# EAGLE board Synth-v0.61 (EAGLE 7.6.0)
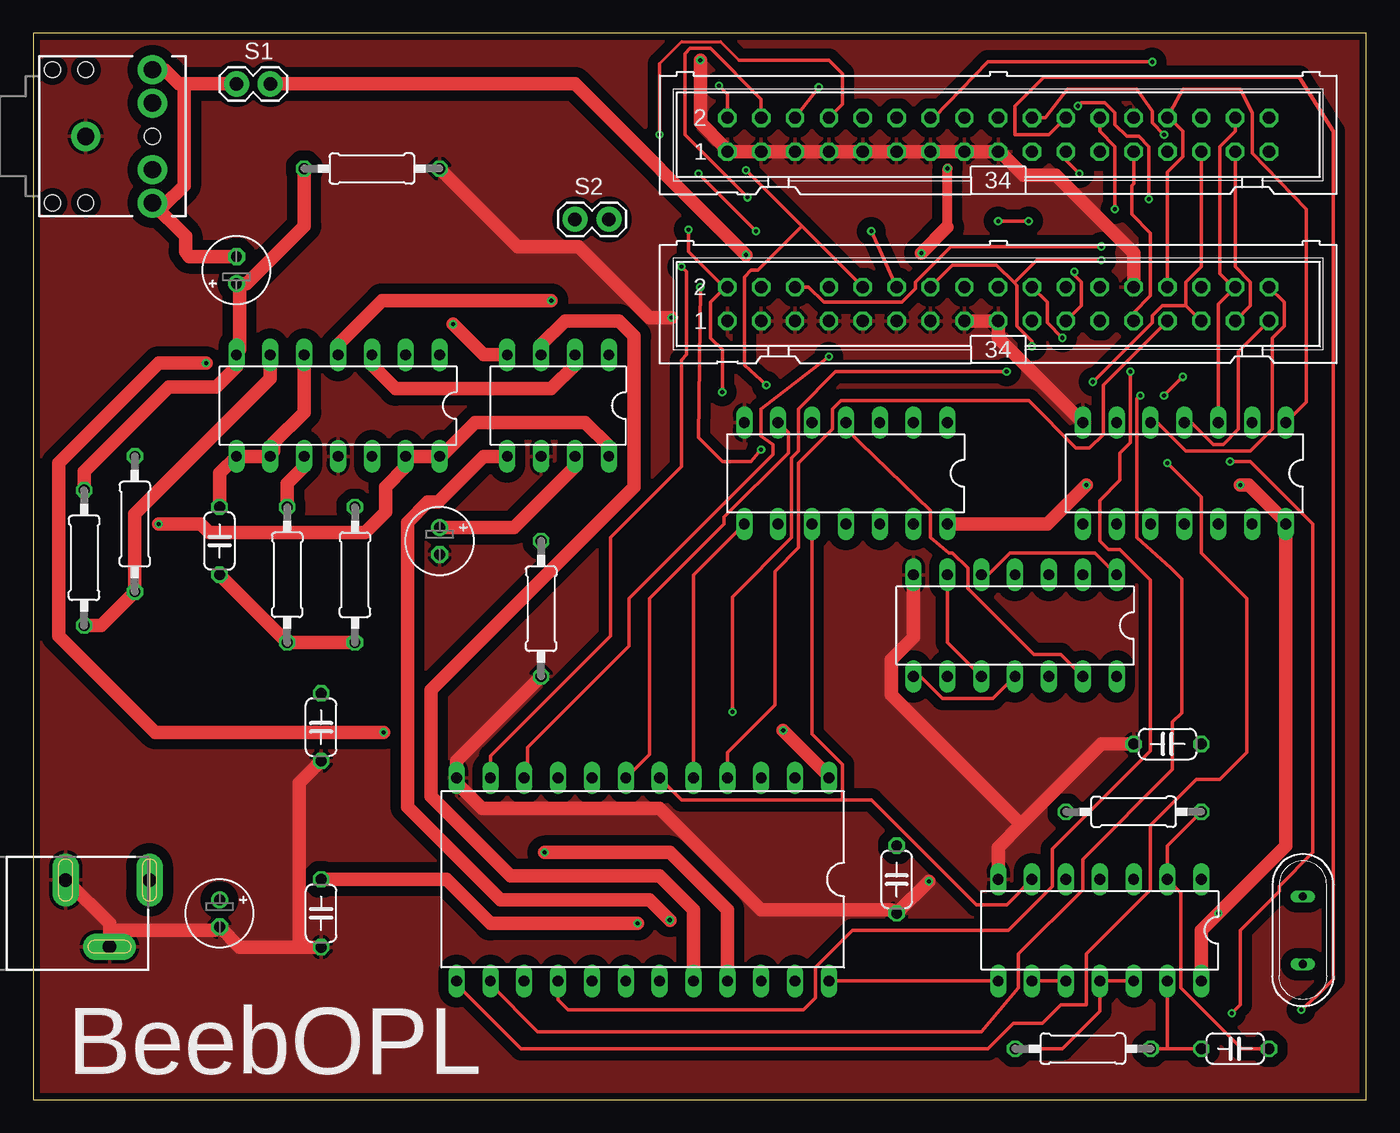
[diagram p0: board, top side]
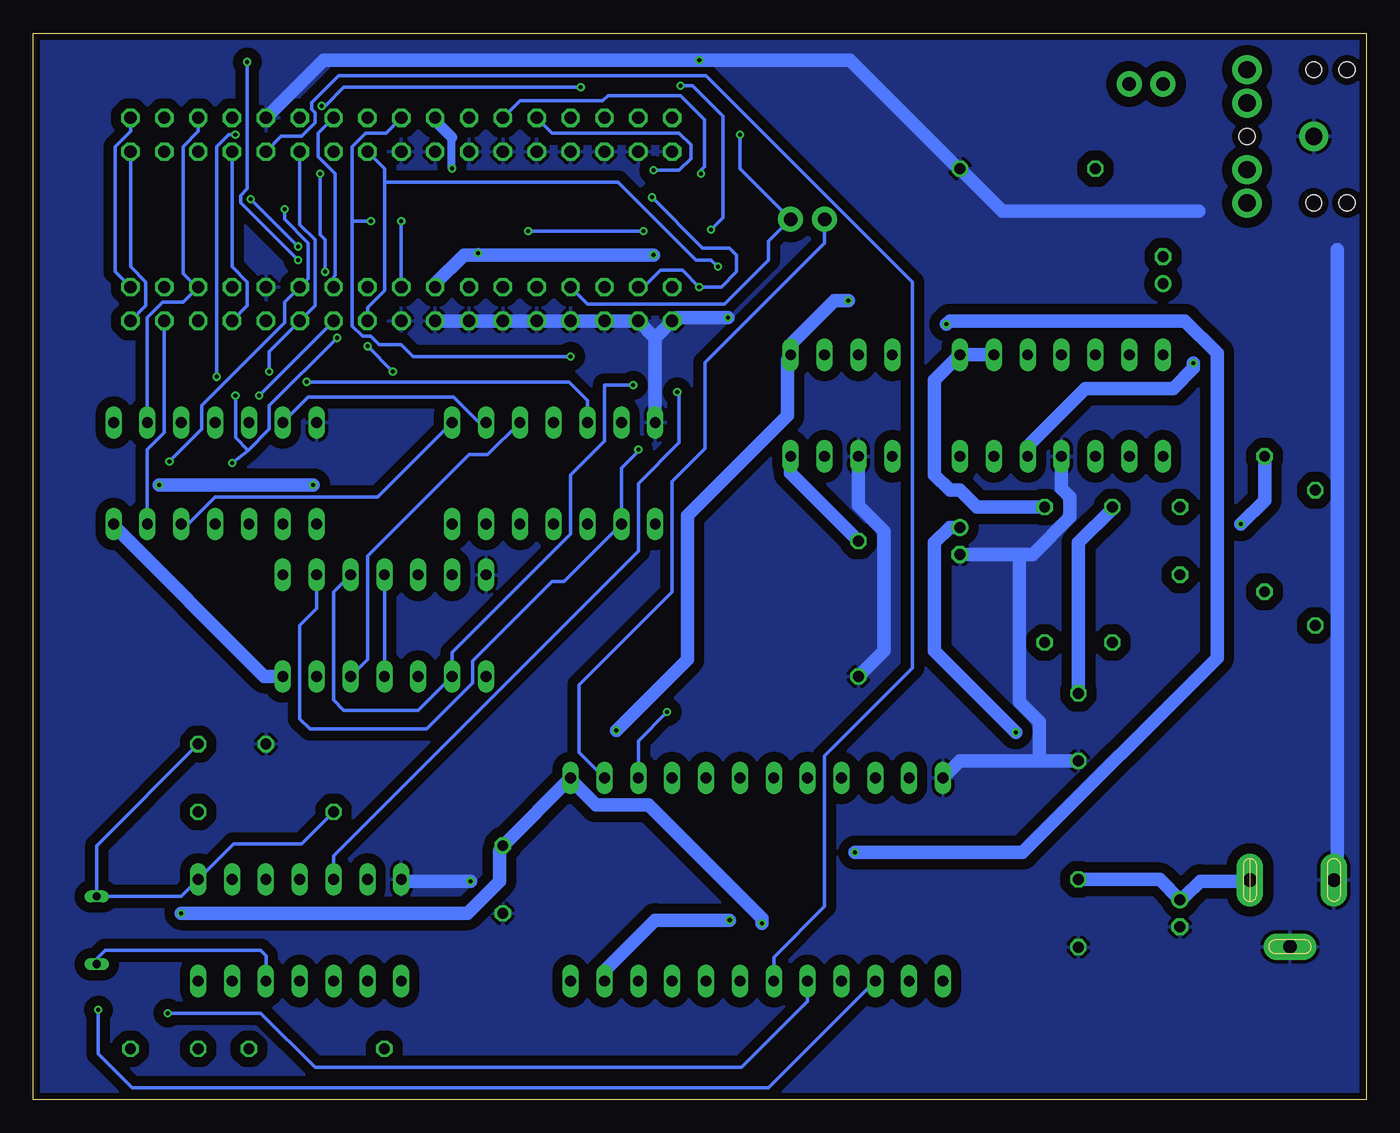
[diagram p1: board, bottom side, seen from below]

Size 100 x 80 mm. Coordinates in mm from the lower left corner, seen from the top.
Outline: 0,0 100,0 100,80 0,80 0,0
Copper layers (1*16): Top 0.035mm / dielectric 1.6mm / Bottom 0.035mm
Design rules "PCBWay_2-layer_PCB_eagle_rule": minimum track width 6mil, minimum drill 12mil, track to track 6mil, track to pad 6mil, pad to pad 6mil, via to via 8mil, smd to smd 0mil, copper to edge 20mil, drill to drill 10mil, minimum pad ring 6mil, minimum via ring 6mil, stop-mask expansion 0mil, vias tented up to drill 100mil, thermal gap 10mil
Net classes: 0 default: width 0.254 mm, clearance 0.254 mm; 1 pwr: width 1.016 mm, clearance 0.762 mm; 2 audio: width 1.016 mm, clearance 0.762 mm; 3 gnd: width 1.016 mm, clearance 0.762 mm

## Footprints (pad centres in the part's own frame; a part is rotated, then mirrored left to right if it is on the bottom)
E2-5 = drill 0.813 pad 1.27: + -1.016,0 | drill 0.813 pad 1.27 octagon: - 1.016,0
C050-024X044 = drill 0.813 octagon: 1 -2.54,0; 2 2.54,0
DIL14 = drill 0.813 long: 1 -7.62,-3.81; 2 -5.08,-3.81; 3 -2.54,-3.81; 4 0,-3.81; 5 2.54,-3.81; 6 5.08,-3.81; 7 7.62,-3.81; 8 7.62,3.81; 9 5.08,3.81; 10 2.54,3.81; 11 0,3.81; 12 -2.54,3.81; 13 -5.08,3.81; 14 -7.62,3.81
YM3014B = drill 0.813 long: CLOCK 3.81,3.81; GND 1.27,3.81; LOAD 1.27,-3.81; MP -3.81,3.81; RB -1.27,3.81; SD 3.81,-3.81; TOBUFF -1.27,-3.81; VDD -3.81,-3.81
YM3812 = drill 0.813 long: 0M -13.97,7.62; 0SY -11.43,7.62; /CS 1.27,-7.62; /IC -8.89,-7.62; /IRQ -11.43,-7.62; /RD -1.27,-7.62; /WR -3.81,-7.62; A0 -6.35,-7.62; D0 8.89,-7.62; D1 11.43,-7.62; D2 13.97,7.62; D3 11.43,7.62; D4 8.89,7.62; D5 6.35,7.62; D6 3.81,7.62; D7 1.27,7.62; GND 13.97,-7.62; MO -6.35,7.62; NC8 3.81,-7.62; NC9 6.35,-7.62; NC19 -1.27,7.62; NC22 -8.89,7.62; SH -3.81,7.62; VSS -13.97,-7.62
ML34 = drill 0.914 octagon: 1 -20.32,-1.27; 2 -20.32,1.27; 3 -17.78,-1.27; 4 -17.78,1.27; 5 -15.24,-1.27; 6 -15.24,1.27; 7 -12.7,-1.27; 8 -12.7,1.27; 9 -10.16,-1.27; 10 -10.16,1.27; 11 -7.62,-1.27; 12 -7.62,1.27; 13 -5.08,-1.27; 14 -5.08,1.27; 15 -2.54,-1.27; 16 -2.54,1.27; 17 0,-1.27; 18 0,1.27; 19 2.54,-1.27; 20 2.54,1.27; 21 5.08,-1.27; 22 5.08,1.27; 23 7.62,-1.27; 24 7.62,1.27; 25 10.16,-1.27; 26 10.16,1.27; 27 12.7,-1.27; 28 12.7,1.27; 29 15.24,-1.27; 30 15.24,1.27; 31 17.78,-1.27; 32 17.78,1.27; 33 20.32,-1.27; 34 20.32,1.27
AUDIO-JACK = drill 1.3 pad 2.184: RING 5,5; RSH 5,2.5; SLEEVE 0,0; TIP 5,-5; TSH 5,-2.5 | hole 1.2: 0,5; -2.5,5; -2.5,-5; 0,-5; 5,0
POWER_JACK_SLOT = drill 1 pad 2 long: GND@1 2.58,7.5; GND@2 7.58,10.8; PWR 2.58,13.8
0207/10 = drill 0.813 octagon: 1 -5.08,0; 2 5.08,0
1X02 = drill 1.016 pad 1.88: 1 0,0; 2 2.54,0
QS = drill 0.61 long: 1 -2.54,0; 2 2.54,0

## Placement (x,y rotation side)
C1  4.7uF 35V  [E2-5]  15.24,62.23 90 top
C2  470pF  [C050-024X044]  13.97,41.91 90 top
C3  10uF 16V  [E2-5]  30.48,41.91 270 top
C4  220pF  [C050-024X044]  21.59,27.94 270 top
C5  82pF  [C050-024X044]  85.09,26.67 180 top
C6  10uF 16V  [E2-5]  13.97,13.97 270 top
C7  10nF  [C050-024X044]  21.59,13.97 270 top
C8  10nF  [C050-024X044]  64.77,16.51 270 top
C9  4.7nF  [C050-024X044]  90.17,3.81 180 top
IC1  LM324N  [DIL14]  22.86,52.07 180 top
IC2  YM3014B  [YM3014B]  39.37,52.07 180 top
IC3  74LS00N  [DIL14]  60.96,46.99 180 top
IC4  74LS27N  [DIL14]  86.36,46.99 180 top
IC5  74LS02N  [DIL14]  73.66,35.56 180 top
IC6  YM3812  [YM3812]  45.72,16.51 180 top
IC7  74LS04N  [DIL14]  80.01,12.7 180 top
J1  1 MHz Bus  [ML34]  72.39,72.39 0 top
J2  Feed-through  [ML34]  72.39,59.69 0 top
J3  3.5mm Jack  [AUDIO-JACK]  3.94,72.26 0 top
J4  5V DC  [POWER_JACK_SLOT]  -5.08,19.05 270 top
R1  4k7  [0207/10]  25.4,69.85 180 top
R2  27k  [0207/10]  3.81,40.64 90 top
R3  15k  [0207/10]  7.62,43.18 90 top
R4  33k  [0207/10]  19.05,39.37 90 top
R5  33k  [0207/10]  24.13,39.37 270 top
R6  4k7  [0207/10]  38.1,36.83 90 top
R7  470R  [0207/10]  82.55,21.59 0 top
R8  470R  [0207/10]  78.74,3.81 180 top
S1  1MHz Bus Audio  [1X02]  15.24,76.2 0 top
S2  IRQ  [1X02]  40.64,66.04 0 top
XTAL1  3.579MHz  [QS]  95.25,12.7 270 top

## Library data of the parts
C1-C9 R1-R8 = resistor
IC1 = linear
IC2 IC6 = YMSynth
IC3-IC5 IC7 = 74xx-us
J1 J2 = con-harting-ml; OC_FARNELL: unknown; OC_NEWARK: unknown
J3 = SparkFun-Connectors
J4 = SparkFun-Connectors; PROD_ID: PRT-00119
S1 S2 = SparkFun-Retired
XTAL1 = special

## Nets
1MHZE: IC3.9 IC5.2 J1.4 J2.4
/IRQ: J1.8 J2.8 S2.2
/NMI: J1.6 J2.6
/PGFC: IC5.3 IC5.9 J1.10 J2.10
/PGFD: J1.12 J2.12
/RD: IC3.10 IC6./RD IC7.6
/RST: IC6./IC J1.14 J2.14
A0: IC6.A0 J1.27 J2.27
A1: IC4.1 J1.28 J2.28
A2: IC3.5 J1.29 J2.29
A3: IC4.2 J1.30 J2.30
A4: IC4.13 J1.31 J2.31
A5: IC4.3 J1.32 J2.32
A6: IC4.4 J1.33 J2.33
A7: IC4.5 J1.34 J2.34
AUDIO [audio]: J1.16 J2.16 S1.2
CNPGFC: IC5.4 IC5.8 IC5.11
D0: IC6.D0 J1.18 J2.18
D1: IC6.D1 J1.19 J2.19
D2: IC6.D2 J1.20 J2.20
D3: IC6.D3 J1.21 J2.21
D4: IC6.D4 J1.22 J2.22
D5: IC6.D5 J1.23 J2.23
D6: IC6.D6 J1.24 J2.24
D7: IC6.D7 J1.25 J2.25
GND [gnd]: C3.- C4.2 C5.2 C6.- C7.2 C8.2 IC1.11 IC2.GND IC3.7 IC4.7 IC5.7 IC6.GND IC7.7 J1.1 J1.3 J1.5 J1.7 J1.9 J1.11 J1.13 J1.15 J1.17 J1.26 J2.1 J2.3 J2.5 J2.7 J2.9 J2.11 J2.13 J2.15 J2.17 J2.26 J3.SLEEVE J4.GND@1 J4.GND@2 R1.1 R6.1
N$1: C9.1 IC7.2 R7.2
N$2: IC3.1 IC4.12
N$3: IC3.2 IC4.6
N$4: IC7.11 IC7.12 R8.2 XTAL1.2
N$5: C9.2 IC7.13 R8.1
N$6 [audio]: IC2.LOAD IC6.SH
N$7 [audio]: IC2.SD IC6.MO
N$8 [audio]: IC2.CLOCK IC6.0SY
N$9: C5.1 IC7.1 R7.1 XTAL1.1
N$10: IC5.1 IC5.5
N$11 [audio]: C3.+ IC1.12 IC2.RB
N$12: IC5.6 IC5.10
N$13 [audio]: IC1.13 IC1.14 IC2.MP R3.2 R6.2
N$14: IC3.3 IC5.12
N$15 [audio]: IC1.6 R2.1 R3.1
N$16 [audio]: C1.+ IC1.7 R1.2 R2.2
N$17 [audio]: C1.- J3.RING J3.TIP S1.1
N$18 [audio]: IC1.3 IC2.TOBUFF
N$19 [audio]: IC1.1 IC1.2 R5.1
N$20 [audio]: C2.1 R4.1 R5.2
N$21 [audio]: C4.1 IC1.10 R4.2
N$22 [audio]: C2.2 IC1.5 IC1.8 IC1.9
N$23: IC3.4 IC5.13
N$24: IC3.8 IC6./WR
N$25: IC6.0M IC7.8
N$26: IC7.9 IC7.10
N$30: IC3.6 IC6./CS
R/W: IC7.5 J1.2 J2.2
VCC [pwr]: C6.+ C7.1 C8.1 IC1.4 IC2.VDD IC3.14 IC4.14 IC5.14 IC6.VSS IC7.14 J4.PWR
YM/IRQ: IC6./IRQ S2.1

## Tracks (layer width: path | path; a pad name or v marks a point on that pad's centre or on a via)
1MHZE  (via drill 0.3)
  Top 0.254: v53.59,67.69 48.9,72.39 48.9,78.49 49.28,78.87 50.8,78.87 54.61,75.06 J1.4 | v54.61,48.77 53.85,47.88 51.69,47.88 49.91,49.66 v50.04,60.96
  Bottom 0.254: IC5.2 78.74,36.83 80.01,35.56 80.01,28.57 79.25,27.81 70.48,27.81 67.06,31.24 67.06,32.89 61.09,38.86 60.2,38.86 IC3.9 55.88,47.37 54.74,48.51 v54.61,48.77 | v53.59,67.69 49.78,63.88 47.75,63.88 47.24,63.37 47.24,62.1 48.39,60.96 v50.04,60.96 51.31,62.23 52.96,62.23 54.23,60.96 J2.4
/IRQ  (via drill 0.3)
  Top 0.229: 46.99,77.72 48.64,79.38 51.56,79.38 52.96,77.98
  Top 0.254: J1.8 60.71,74.68 60.71,76.96 59.69,77.98 52.96,77.98 | 46.99,77.72 v46.99,72.39
  Bottom 0.254: J2.8 58.42,59.69 48.13,59.69 44.83,62.99 44.83,64.39 S2.2 46.99,69.85 v46.99,72.39
/NMI  (via drill 0.3)
  Top 0.254: J2.6 58.17,60.96 59.31,59.82 65.15,59.82 66.17,60.83 66.17,61.34 68.83,64.01 v80.14,64.01 | v83.69,67.56 83.69,71.5 82.93,72.26 82.04,72.26 81.15,73.15 81.15,74.04 80.39,74.8 78.61,74.8 v78.36,74.55 | J1.6 v58.93,75.95
  Bottom 0.254: v83.69,67.56 v80.14,64.01 | v78.36,74.55 78.11,74.55 76.71,75.95 v58.93,75.95
/PGFC  (via drill 0.3)
  Top 0.254: v53.47,69.72 57.66,65.53 | 57.66,65.53 J2.10 | v54.99,53.59 54.61,53.98 53.34,55.12 53.34,61.72 53.85,62.23 54.36,62.23 57.66,65.53
  Bottom 0.254: IC5.3 77.47,38.1 77.47,29.97 76.71,29.21 71.12,29.21 IC5.9 68.58,33.53 59.69,42.42 59.69,46.86 57.15,49.4 57.15,53.59 v54.99,53.59 | v53.47,69.72 51.56,69.72 50.67,70.61 50.67,71.63 51.56,72.52 61.09,72.52 J1.10
/PGFD  (via drill 0.3)
  Top 0.254: v62.87,65.15 J2.12 | v49.91,69.47 v54.23,65.15
  Bottom 0.254: v54.23,65.15 v62.87,65.15 | v49.91,69.47 49.91,69.72 49.66,69.98 49.66,73.53 51.44,75.31 56.9,75.31 57.28,74.93 63.5,74.93 J1.12 63.63,74.8
/RD
  Top 0.254: IC7.6 73.03,14.61 70.74,14.61 62.87,22.48 60.71,22.48 | 60.71,22.48 48.64,22.48 IC6./RD | IC3.10 58.42,27.43 60.71,25.15 60.71,22.48
/RST  (via drill 0.3)
  Top 0.254: v73.03,54.61 60.2,54.61 57.4,51.82 57.4,48.64 56.9,48.13 56.9,42.16 52.45,37.72 v52.45,29.08 | v74.93,56.52 74.93,56.9 73.79,58.04 73.79,61.09 73.6,61.28 | 73.6,61.28 72.26,62.61 68.96,62.61 J2.14 | J1.14 67.56,73.66 71.63,77.85 v83.95,77.85 | v80.14,62.99 75.31,62.99 73.6,61.28
  Bottom 0.254: v74.93,56.52 v73.03,54.61 | v83.95,77.85 83.95,68.33 84.45,67.82 84.45,67.31 v80.14,62.99 | v52.45,29.08 54.61,26.92 IC6./IC
A0
  Top 0.254: IC6.A0 52.07,26.04 55.63,29.59 55.63,39.62 57.4,41.4 57.4,47.75 59.94,50.29 59.94,51.82 60.58,52.45 74.68,52.45 78.23,48.9 79.25,48.9 80.26,49.91 80.26,53.59 J2.27
  Bottom 0.254: J1.27 85.09,62.48 83.95,61.34 83.95,59.56 J2.27
A1
  Top 0.254: J2.28 85.09,69.6 86.23,70.74 86.23,72.64 85.22,73.66 J1.28 86.23,75.82 90.55,75.82 91.44,74.04 91.44,70.99 95.5,66.8 95.5,52.32 IC4.1
A2  (via drill 0.3)
  Top 0.254: v79.5,53.85 83.95,58.29 83.95,58.8 84.71,59.56 86.49,59.56 | J2.29 86.49,59.56 | J1.29 87.63,62.48 86.49,61.34 86.49,59.56
  Bottom 0.254: v79.5,53.85 59.82,53.85 58.42,52.45 IC3.5
A3
  Bottom 0.254: IC4.2 91.44,58.67 90.3,59.82 88.77,59.82 J2.30 87.76,60.96 88.77,61.98 88.77,71.5 87.63,72.64 J1.30
A4
  Top 0.254: J1.31 90.17,62.48 91.31,61.34 91.31,59.56 J2.31
  Bottom 0.254: IC4.13 91.44,48.77 90.17,50.04 J2.31
A5
  Top 0.254: IC4.3 88.9,59.69 J2.32 90.04,60.96 89.03,61.98 89.03,71.5 90.17,72.64 J1.32
A6
  Top 0.254: IC4.4 86.87,50.8 88.52,49.15 89.28,49.15 90.42,50.29 90.42,56.13 J2.33
  Bottom 0.254: J1.33 92.71,62.48 91.57,61.34 91.57,59.56 J2.33
A7
  Top 0.254: IC4.5 84.33,50.8 86.49,48.64 91.31,48.64 92.96,50.29 92.96,57.15 93.85,58.04 93.85,59.82 J2.34
  Bottom 0.254: J1.34 92.71,72.64 93.85,71.5 93.85,62.1 J2.34
AUDIO  (via drill 0.3)
  Top 0.61: 68.56,65.45 68.59,65.49
  Top 0.737: 68.59,65.49 v68.59,69.86
  Top 1.016: v53.47,63.37 40.64,76.2 S1.2 | v66.62,63.52 68.56,65.45
  Bottom 0.61: v68.59,69.86 68.6,70 68.6,72.19 | 69.85,73.44 J1.16
  Bottom 0.762: v66.62,63.52 66.67,63.5 66.67,63.37
  Bottom 0.813: 68.6,72.19 69.85,73.44
  Bottom 1.016: J2.16 69.85,61.21 67.69,63.37 66.67,63.37 v53.47,63.37
CNPGFC
  Top 0.254: IC5.8 66.55,31.75 68.2,30.1 72.01,30.1 IC5.11
  Bottom 0.254: IC5.11 IC5.4
D0  (via drill 0.3)
  Top 0.254: v59.69,55.75 54.61,51.82 54.61,49.78 55.5,49.15 55.5,48.39 44.7,37.59 44.7,34.04 37.08,26.42 37.08,24.38 IC6.D0 | v72.39,65.91 v74.68,65.91
  Bottom 0.254: 76.07,65.91 76.07,71.5 75.06,72.52 73.53,72.52 J1.18 | 76.07,65.91 76.07,58.04 75.31,57.28 74.68,57.28 74.04,56.64 72.39,56.64 71.5,55.75 v59.69,55.75 | v72.39,65.91 J2.18 | v74.68,65.91 76.07,65.91
D1  (via drill 0.3)
  Top 0.254: IC6.D1 34.29,25.78 43.31,34.8 43.31,42.16 48.64,47.5 48.64,55.5 49.02,55.88 49.02,62.1 v48.64,62.48
  Bottom 0.254: J2.19 74.93,59.44 73.66,60.71 73.66,68.83 | 73.66,68.83 56.13,68.83 50.29,62.99 49.15,62.99 v48.64,62.48 | 73.66,68.83 73.66,69.85 J1.19
D2  (via drill 0.3)
  Top 0.254: v77.22,57.15 76.07,58.29 76.07,59.82 J2.20 | J1.20 75.95,73.66 77.6,75.82 82.8,75.82 83.95,74.17 83.95,73.28 v84.84,72.39 | v84.84,52.83 v86.23,54.23 | v85.09,47.75 87.63,45.21 87.63,41.02 91.06,37.59 91.06,26.04 89.03,24 87.25,24 83.82,20.57 83.82,15.75 78.99,10.92 78.99,7.11 77.09,7.11 75.69,5.71 73.53,5.71 71.63,3.81 36.58,3.81 31.75,8.64 IC6.D2
  Bottom 0.254: 83.88,48.7 82.3,50.29 82.3,52.07 v77.22,57.15 | 83.88,48.7 v85.09,47.75 | v84.84,72.39 85.34,72.39 86.23,71.5 v86.23,54.23 | v84.84,52.83 84.84,49.66 83.88,48.7
D3  (via drill 0.3)
  Top 0.254: v83.06,52.83 82.8,52.58 82.8,42.16 85.34,39.88 86.17,39.05 86.17,29.02 85.47,28.32 85.47,24.77 78.74,18.03 78.74,15.75 73.91,10.92 73.91,8.38 71.12,5.08 37.85,5.08 34.29,8.64 IC6.D3 | J1.21 77.47,70.48 v78.49,69.47 | v78.11,62.1 78.11,61.85 78.61,61.34 78.61,59.56 J2.21
  Bottom 0.254: J2.21 v83.06,52.83 | v78.49,69.47 78.49,64.9 78.11,64.52 v78.11,62.1
D4  (via drill 0.3)
  Top 0.254: J1.22 76.2,72.39 73.66,72.39 73.66,74.55 75.82,76.71 95,76.71 97.54,72.64 97.54,9.02 96.27,7.75 v95.12,6.73
  Bottom 0.254: J2.22 77.47,61.72 77.34,61.85 77.34,69.47 78.61,70.74 78.61,72.52 J1.22 | IC6.D4 44.83,0.89 92.58,0.89 95.12,3.43 v95.12,6.73
D5  (via drill 0.3)
  Top 0.254: v82.3,54.61 82.3,49.28 81.53,48.51 81.53,46.48 80.01,44.96 80.01,41.91 80.64,41.27 81.53,41.27 83.82,38.99 83.82,26.16 76.45,18.8 76.45,16 73.15,12.7 61.47,12.7 58.67,9.91 58.67,7.62 57.78,6.73 40.13,6.73 39.37,7.49 IC6.D5
  Bottom 0.254: v82.3,54.61 82.3,56.13 J2.23 78.87,59.56 78.87,64.52 80.01,65.66 J1.23
D6  (via drill 0.3)
  Top 0.254: v89.79,47.88 91.31,47.88 96.01,43.18 96.01,18.54 93.47,16 93.47,15.62 90.55,12.7 90.55,7.11 v89.92,6.48 | J1.24 80.01,72.64 81.15,71.5 v81.15,66.8
  Bottom 0.254: v89.79,47.88 87.38,50.29 87.38,52.07 81.15,58.29 81.15,59.82 J2.24 79.38,61.59 79.38,64.26 81.15,66.04 v81.15,66.8 | IC6.D6 41.91,7.37 46.86,2.41 78.87,2.41 82.93,6.48 v89.92,6.48
D7
  Top 0.254: J2.25 82.55,59.05 83.82,60.33 83.82,65.02 82.42,66.42 82.42,68.58 82.55,68.71 J1.25
  Bottom 0.254: J1.25 81.41,72.26 79.88,72.26 78.87,73.28 78.87,74.04 79.12,74.3 79.12,74.8 77.09,76.83 49.53,76.83 34.04,61.34 34.04,32.38 40.64,25.78 40.64,14.48 44.45,10.67 IC6.D7
GND  (via drill 0.3)
  Top 1.016: J2.26 82.55,63.5 76.71,69.34 74.3,69.34 72.77,70.87 J1.17 J1.15 J1.13 J1.11 J1.9 J1.7 J1.5 J1.3 J1.1 51.82,71.5 50.04,73.28 v50.04,77.98 | IC4.7 72.39,57.15 J2.17 J2.15 | v47.88,58.67 46.23,58.67 40.89,64.01 36.32,64.01 R1.1 | v67.18,16.38 C8.2 64.39,14.22 54.61,14.22 46.99,21.84 33.66,21.84 31.75,23.75 IC6.GND 31.75,25.4 R6.1 | C5.2 80.14,26.67 74.11,20.64 | 74.11,20.64 72.39,18.92 IC7.7 | IC5.7 66.04,34.67 64.39,33.02 64.39,30.35 74.11,20.64 | 19.94,11.43 15.49,11.43 C6.- 13.59,12.7 5.71,12.7 | 19.94,11.43 C7.2 | 5.71,12.7 5.71,13.21 2.54,16.38 J4.GND@1 | 5.71,12.7 5.71,11.56 J4.GND@2 | 19.94,11.43 19.94,23.75 C4.2
  Bottom 1.016: 53.34,57.15 IC3.7 | 53.34,57.15 J2.1 51.69,58.67 v47.88,58.67 | 53.34,57.15 J2.3 J2.5 J2.7 J2.9 J2.11 J2.13 J2.15 | J1.26 78.23,77.98 v50.04,77.98 38.73,77.98 30.86,70.1 R1.1 27.3,66.67 12.57,66.67 | v67.18,16.38 72.26,16.38 IC7.7 | IC1.11 22.86,45.85 22.23,45.21 22.23,43.69 25.02,40.89 26.04,40.89 | C3.- 26.04,40.89 | 24.51,25.4 30.48,25.4 IC6.GND | 24.51,25.4 C4.2 | IC2.GND 38.1,44.58 36.2,42.67 36.2,33.66 R6.1 | 26.04,40.89 26.04,29.84 24.51,28.32 24.51,25.4 | 2.16,63.75 2.16,17.4 2.42,17.14 J4.GND@1
  pour Bottom: -5.08,83.82 104.14,83.82 104.14,-2.54 -5.08,-2.54
  pour Top: -5.08,83.82 104.14,83.82 104.14,-2.54 -5.08,-2.54
N$1
  Top 0.254: R7.2 85.09,19.05 IC7.2 86.11,15.49 86.11,8.38 90.68,3.81 C9.1
N$2
  Bottom 0.254: IC4.12 88.39,43.18 86.36,45.21 74.17,45.21 IC3.1
N$3
  Bottom 0.254: IC3.2 66.55,50.8 68.45,52.7 79.38,52.7 IC4.6
N$4
  Top 0.254: IC7.12 IC7.11 80.01,6.6 77.22,3.81 R8.2
  Bottom 0.254: IC7.12 82.55,10.79 82.93,11.18 94.61,11.18 95.25,10.54 XTAL1.2
N$5
  Top 0.254: C9.2 85.09,3.81 | 85.09,3.81 R8.1 | 85.09,3.81 IC7.13
N$6
  Top 1.016: IC2.LOAD 38.1,56.64 39.88,58.42 43.94,58.42 45.09,57.28 45.09,45.97 29.84,30.73 29.84,22.73 35.81,16.76 46.99,16.76 49.53,14.22 IC6.SH
N$7  (via drill 0.3)
  Top 1.016: IC2.SD 33.78,55.88 v31.5,58.17 | v38.35,18.54 47.75,18.54 52.07,14.22 IC6.MO
  Bottom 1.016: v31.5,58.17 31.24,58.42 13.59,58.42 11.18,56.01 11.18,33.15 25.78,18.54 v38.35,18.54
N$8  (via drill 0.3)
  Top 1.016: IC2.CLOCK 33.78,48.26 30.35,44.83 29.59,44.83 28.07,43.31 28.07,21.97 35.05,14.99 46.23,14.99 v47.75,13.46
  Bottom 1.016: v47.75,13.46 53.34,13.46 57.15,9.65 IC6.0SY
N$9
  Bottom 0.254: IC7.1 88.9,15.24 XTAL1.1 95.25,19.05 C5.1 | IC7.1 87.88,16.51 | R7.1 79.88,19.18 84.96,19.18 IC7.1
N$10
  Top 0.254: IC5.5 71.63,39.37 73.28,41.02 79.63,41.02 IC5.1
N$11  (via drill 0.3)
  Top 1.016: v12.95,55.24 9.4,55.24 1.91,47.75 1.91,34.8 9.14,27.56 v26.29,27.56 | IC2.RB 40.64,47.5 36.07,42.93 C3.+
  Bottom 1.016: IC1.12 25.4,49.02 21.08,53.34 14.48,53.34 12.95,54.86 v12.95,55.24 | v26.29,27.56 32.38,33.66 32.38,41.78 31.24,42.93 C3.+
N$12
  Top 0.254: IC5.6 68.58,34.29 IC5.10
N$13  (via drill 0.3)
  Top 1.016: v9.4,43.18 12.57,43.18 13.21,42.55 24.89,42.55 26.42,44.07 26.42,45.97 27.94,47.5 IC1.13 IC1.14 30.86,48.51 33.15,50.8 41.4,50.8 43.18,49.02 IC2.MP
  Bottom 1.016: R6.2 43.18,46.99 IC2.MP | R3.2 7.62,44.96 v9.4,43.18
N$14
  Bottom 0.254: IC5.12 74.93,33.02 74.93,40.77 67.31,48.39 65.91,48.39 IC3.3
N$15
  Top 1.016: R2.1 5.08,35.56 R3.1 7.62,43.94 17.78,54.1 IC1.6
N$16
  Top 1.016: R1.2 20.32,65.53 16,61.21 C1.+ 15.49,60.83 15.49,56.26 IC1.7 15.24,54.99 13.72,53.47 10.16,53.47 3.81,47.12 R2.2
N$17
  Top 1.016: C1.- 11.68,63.25 11.43,63.63 11.43,64.77 J3.TIP 9.78,67.06 11.3,68.58 11.3,76.2 | 11.3,76.2 10.92,76.2 9.91,77.22 9.02,77.22 J3.RING | 11.3,76.2 S1.1
N$18
  Top 1.016: IC1.3 25.4,55.12 27.18,53.34 38.86,53.34 40.64,55.12 IC2.TOBUFF
N$19
  Bottom 1.016: R5.1 29.21,44.45 30.48,45.72 31.24,45.72 32.38,46.86 32.38,53.98 IC1.1 IC1.2
N$20
  Top 1.016: R5.2 R4.1 C2.1
N$21
  Top 1.016: R4.2 19.05,46.23 20.32,47.5 IC1.10
  Bottom 1.016: C4.1 21.59,41.78 19.05,44.32 R4.2
N$22
  Top 1.016: C2.2 13.97,46.99 IC1.8 IC1.9 18.03,48.64 18.03,49.28 20.32,51.56 IC1.5
N$23
  Top 0.254: IC3.4 60.96,50.29 67.31,44.2 67.31,42.16 68.71,41.02 68.96,41.02 70.1,39.88 70.1,38.35 75.06,33.4 77.09,33.4 IC5.13
N$24
  Top 0.254: IC6./WR 49.53,39.37 IC3.8
N$25
  Top 0.254: IC7.8 IC6.0M
N$26
  Top 0.254: IC7.10 IC7.9
N$30
  Top 0.254: IC3.6 56.64,50.04 56.64,48.51 51.82,43.69 51.82,43.18 46.23,37.59 46.23,25.91 IC6./CS
R/W  (via drill 0.3)
  Top 0.254: J1.2 52.07,75.44 v51.44,76.07 | v49.15,65.28 49.15,63.63 51.82,60.96 J2.2 51.94,60.96 50.8,59.82 50.8,57.15 51.69,56.26 v51.69,53.09
  Bottom 0.254: IC7.5 77.47,18.29 54.61,41.15 54.61,46.23 51.56,49.28 51.56,52.96 v51.69,53.09 | v51.44,76.07 50.55,76.07 48.26,73.79 48.26,66.17 v49.15,65.28
VCC  (via drill 0.3)
  Top 1.016: IC1.4 22.86,56.64 26.16,59.94 v38.86,59.94 | IC3.14 76.07,43.18 v78.99,46.1 | v90.55,46.1 91.19,46.1 93.73,43.56 IC4.14 93.98,19.05 v88.9,13.97 87.63,12.7 IC7.14 | C7.1 30.99,16.51 34.29,13.21 v45.34,13.21 | v56.26,27.69 59.69,24.26 IC6.VSS
  Bottom 1.016: v38.86,59.94 39.88,59.94 43.18,56.64 IC2.VDD 43.43,55.5 43.43,51.31 50.93,43.81 50.93,33.02 v56.26,27.69 | C7.1 15.49,16.51 C6.+ 13.59,15.24 12.45,16.38 8.76,16.38 J4.PWR | v90.55,46.1 v78.99,46.1 | IC5.14 82.68,31.75 93.98,43.05 IC4.14 | v88.9,13.97 67.44,13.97 65.02,16.38 65.02,18.67 C8.1 IC6.VSS 59.44,23.75 57.78,22.1 53.85,22.1 45.34,13.59 v45.34,13.21
YM/IRQ
  Bottom 0.254: S2.1 40.64,64.26 49.59,55.31 49.59,48.83 52.07,46.35 52.07,38.1 59.05,31.11 59.05,26.04 IC6./IRQ

## Text on the board
tNames: BeebOPL